# Altium PCB PC-104 16 bit bus.PCBDOC
Units mil, origin at the board's own origin, x right, y up, seen from the top; angles counter-clockwise.
Board outline 3550 x 3775 mil, 10 copper layers (TopLayer, MidLayer1, MidLayer2, MidLayer3, MidLayer4, MidLayer5, MidLayer6, MidLayer7, MidLayer8, BottomLayer); 2 components, 1 nets, 108 pads, 0 vias.
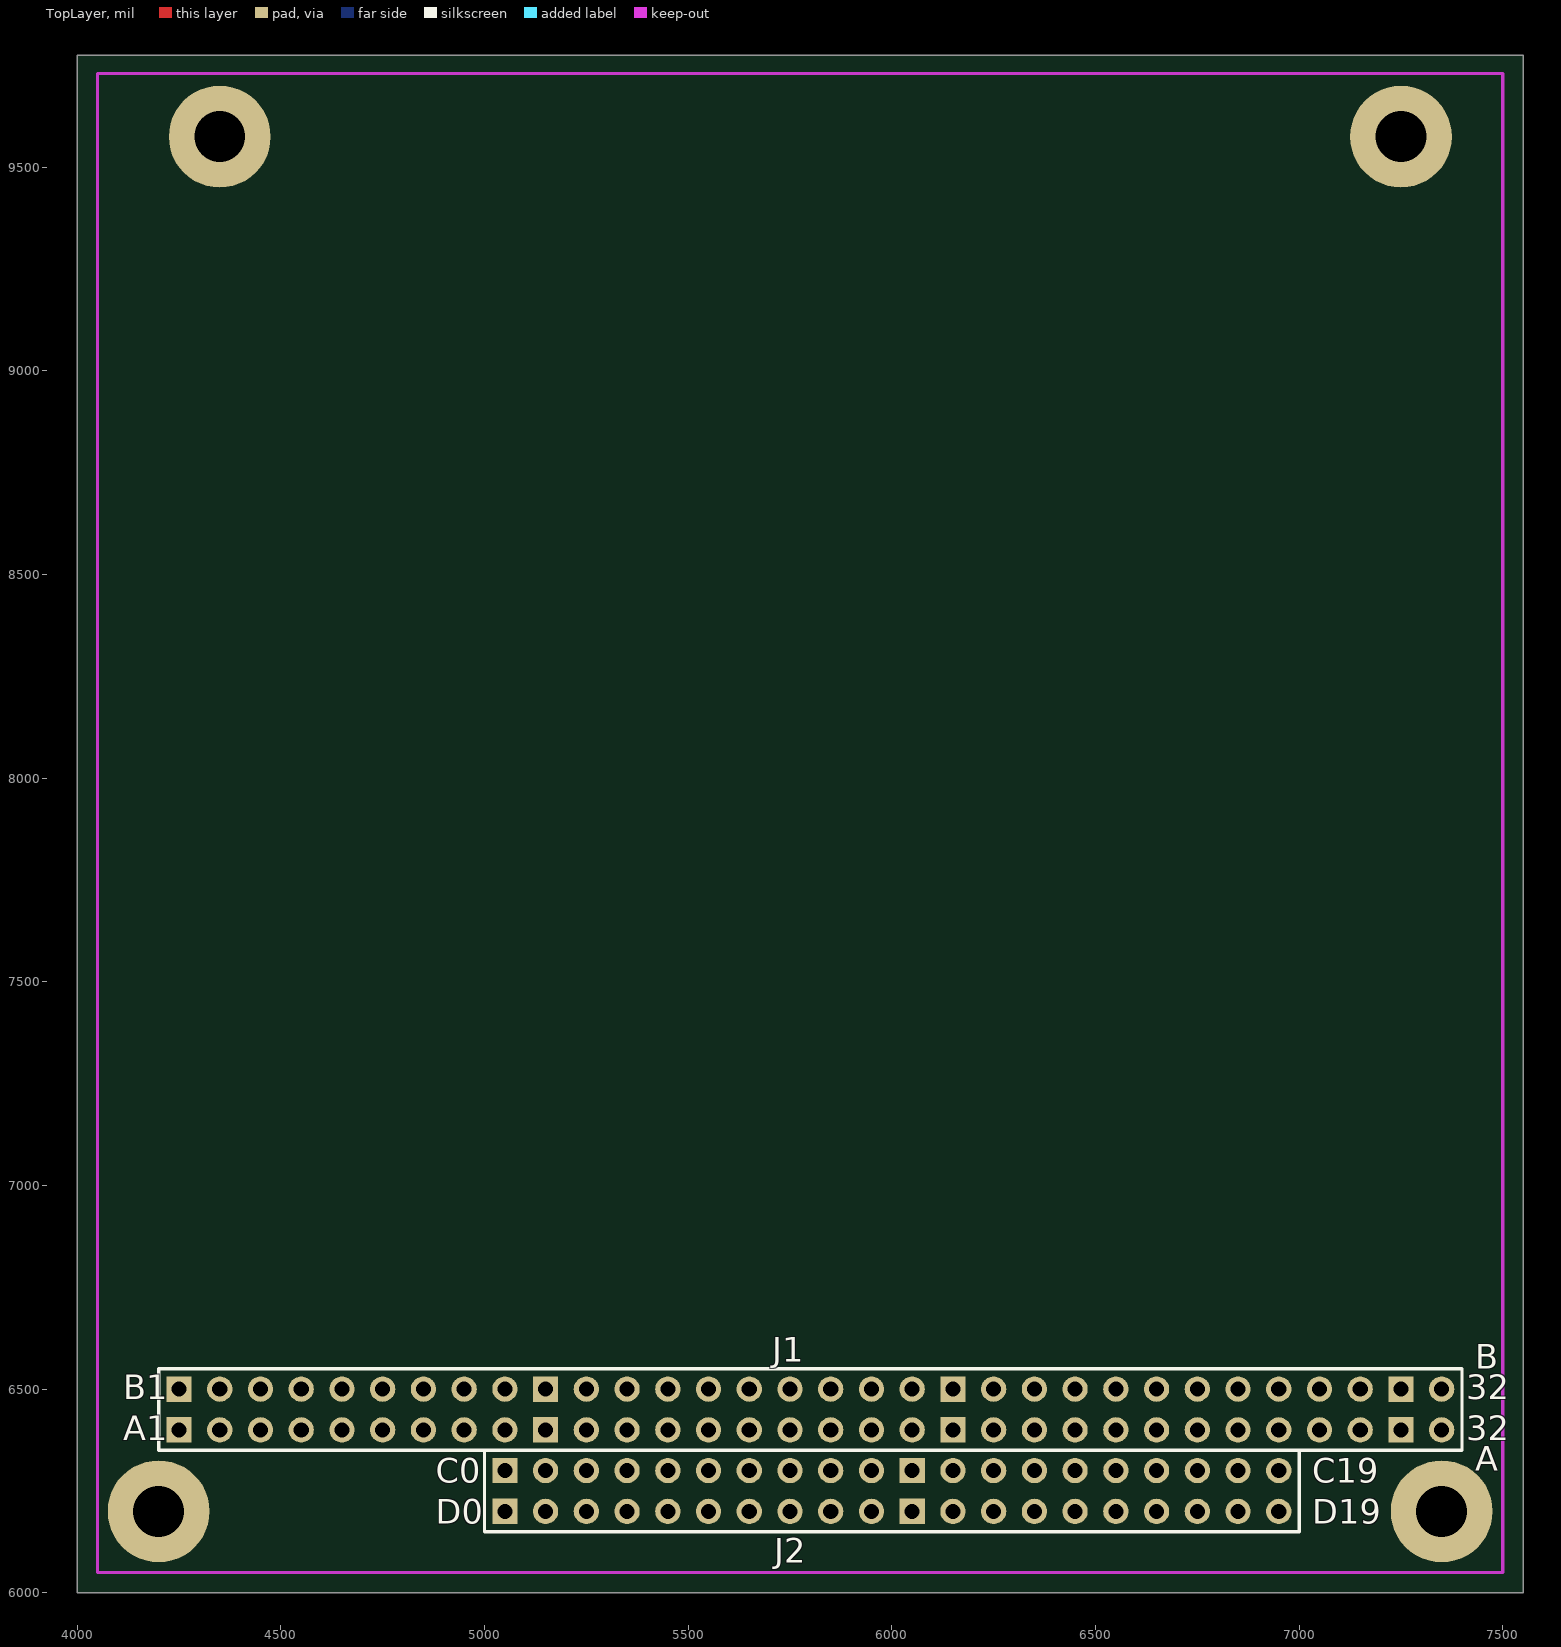
[diagram p0: TopLayer view]
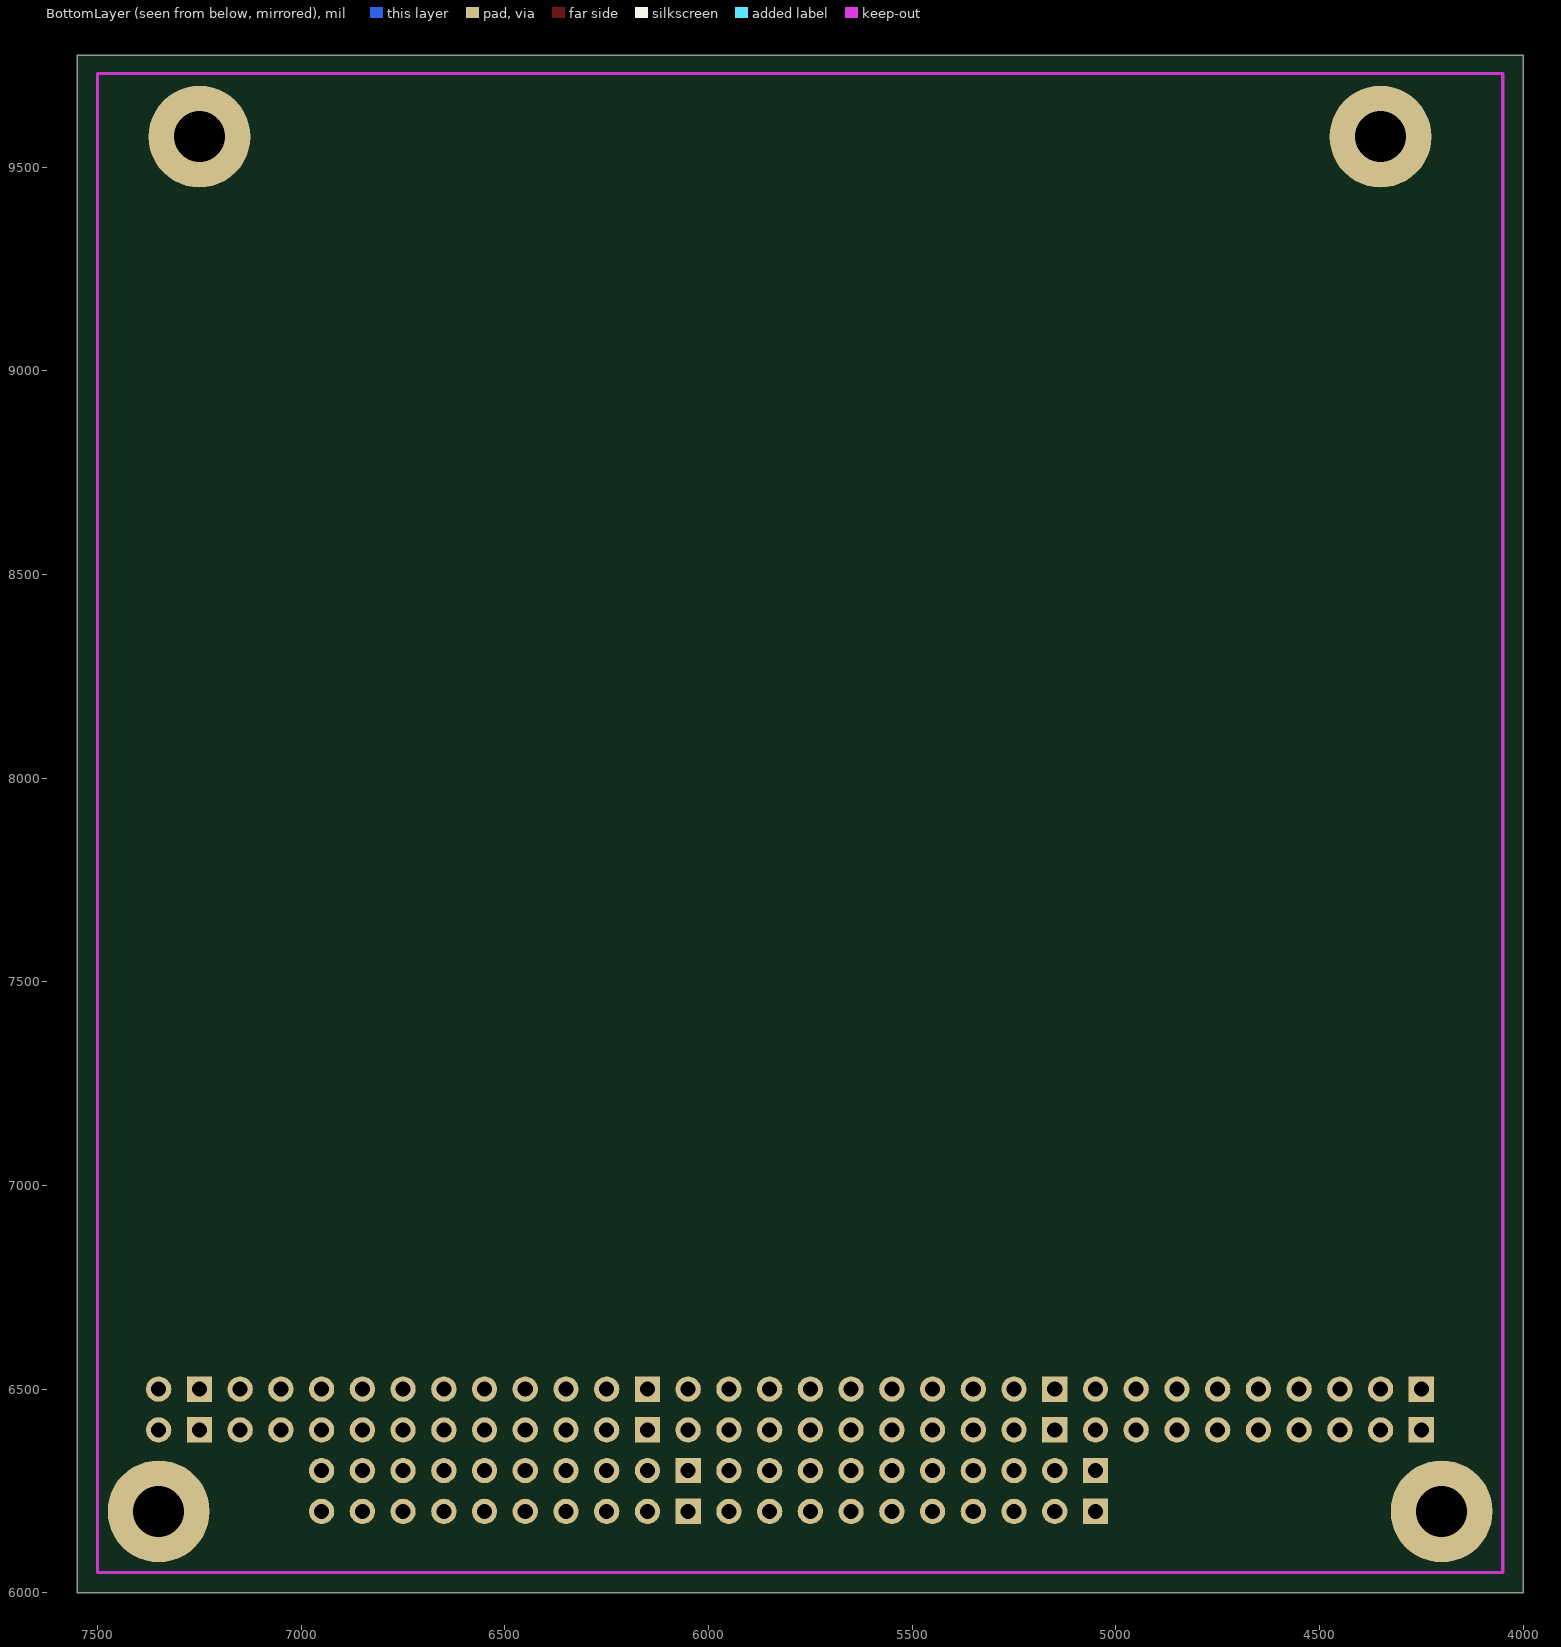
[diagram p1: BottomLayer view, seen from below]
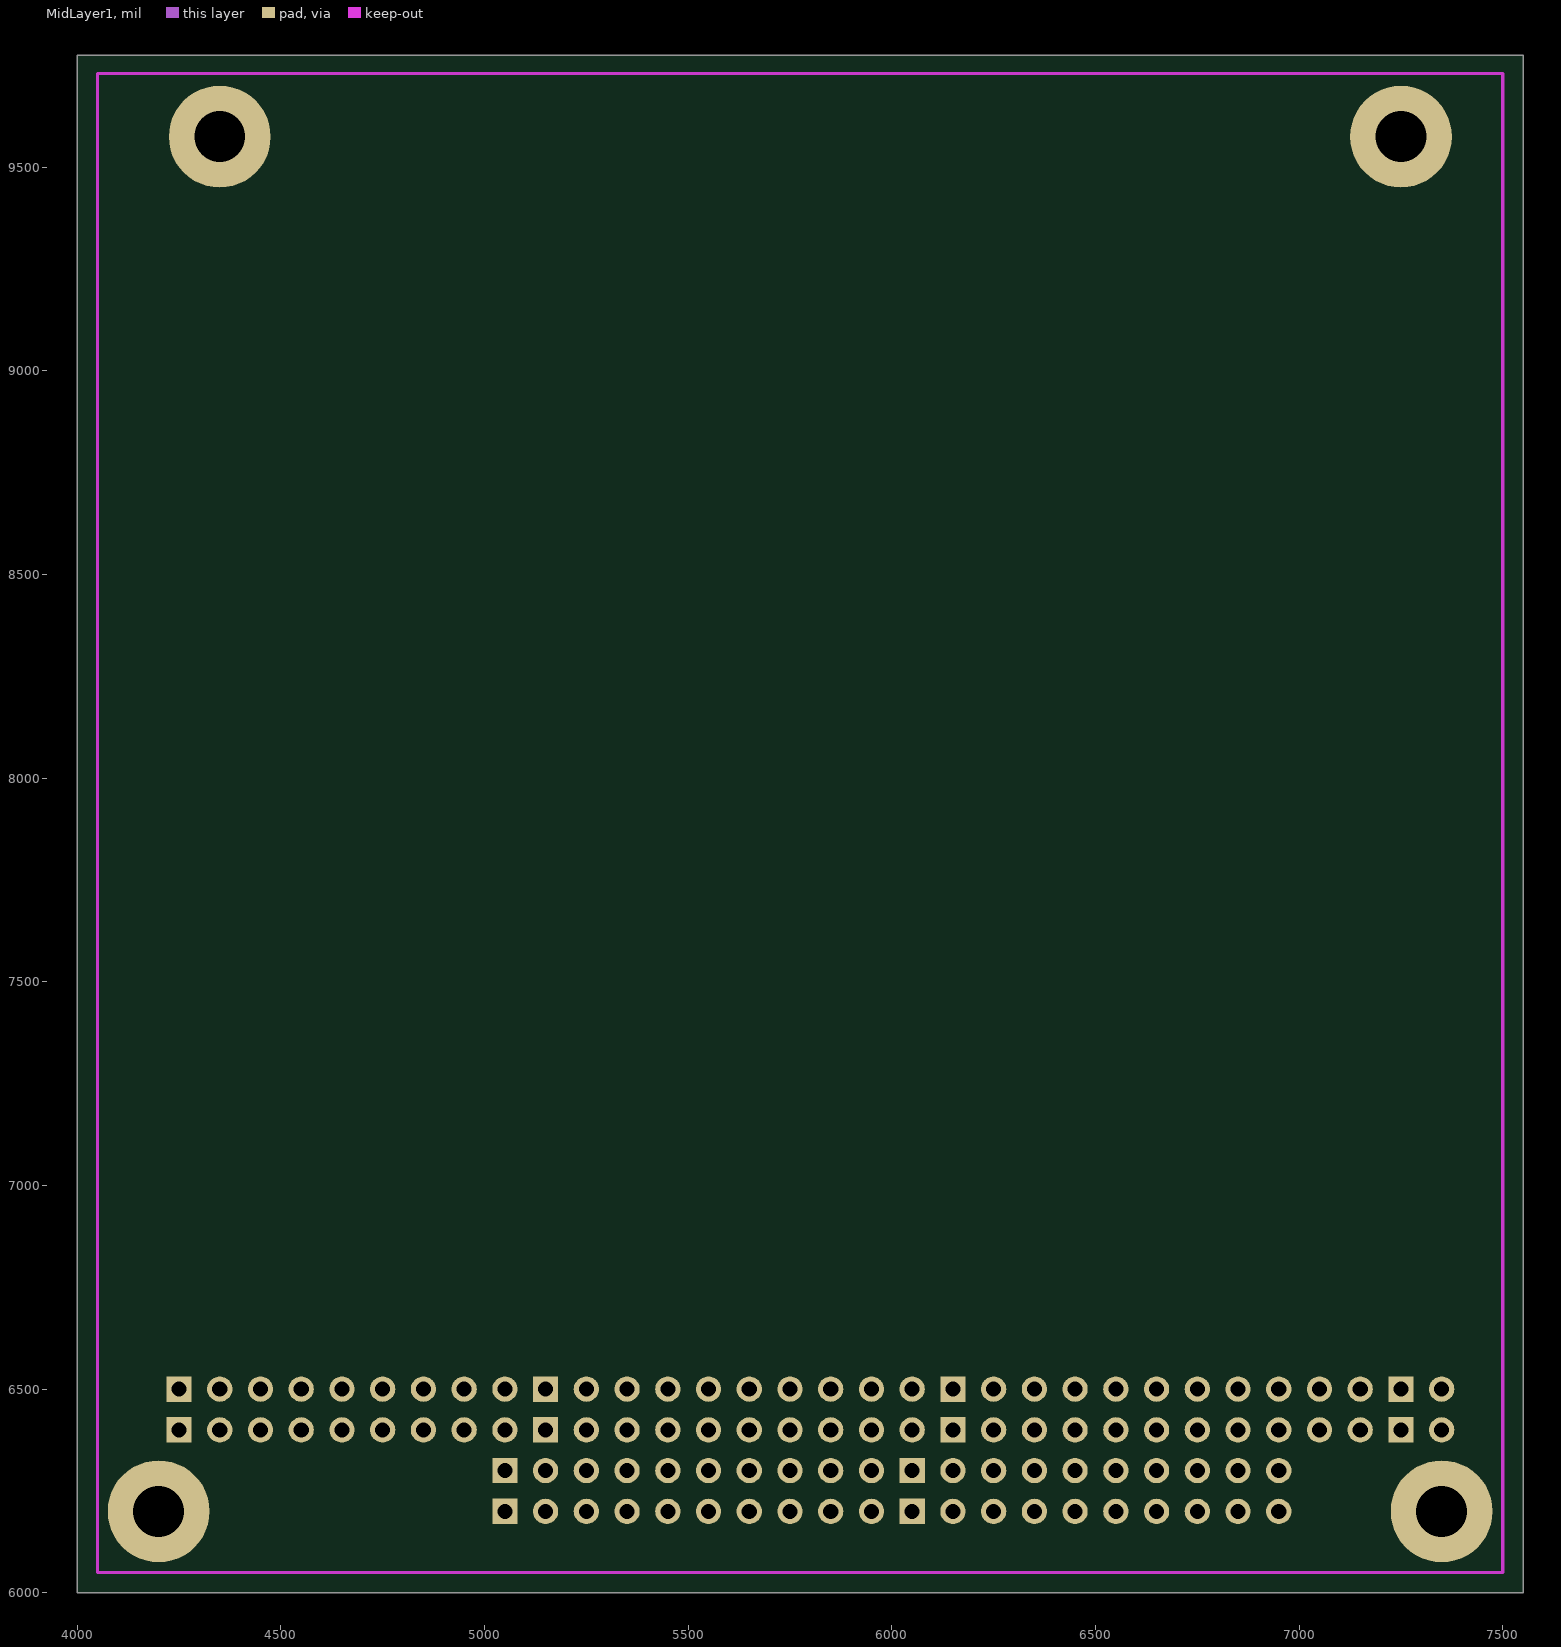
[diagram p2: MidLayer1]
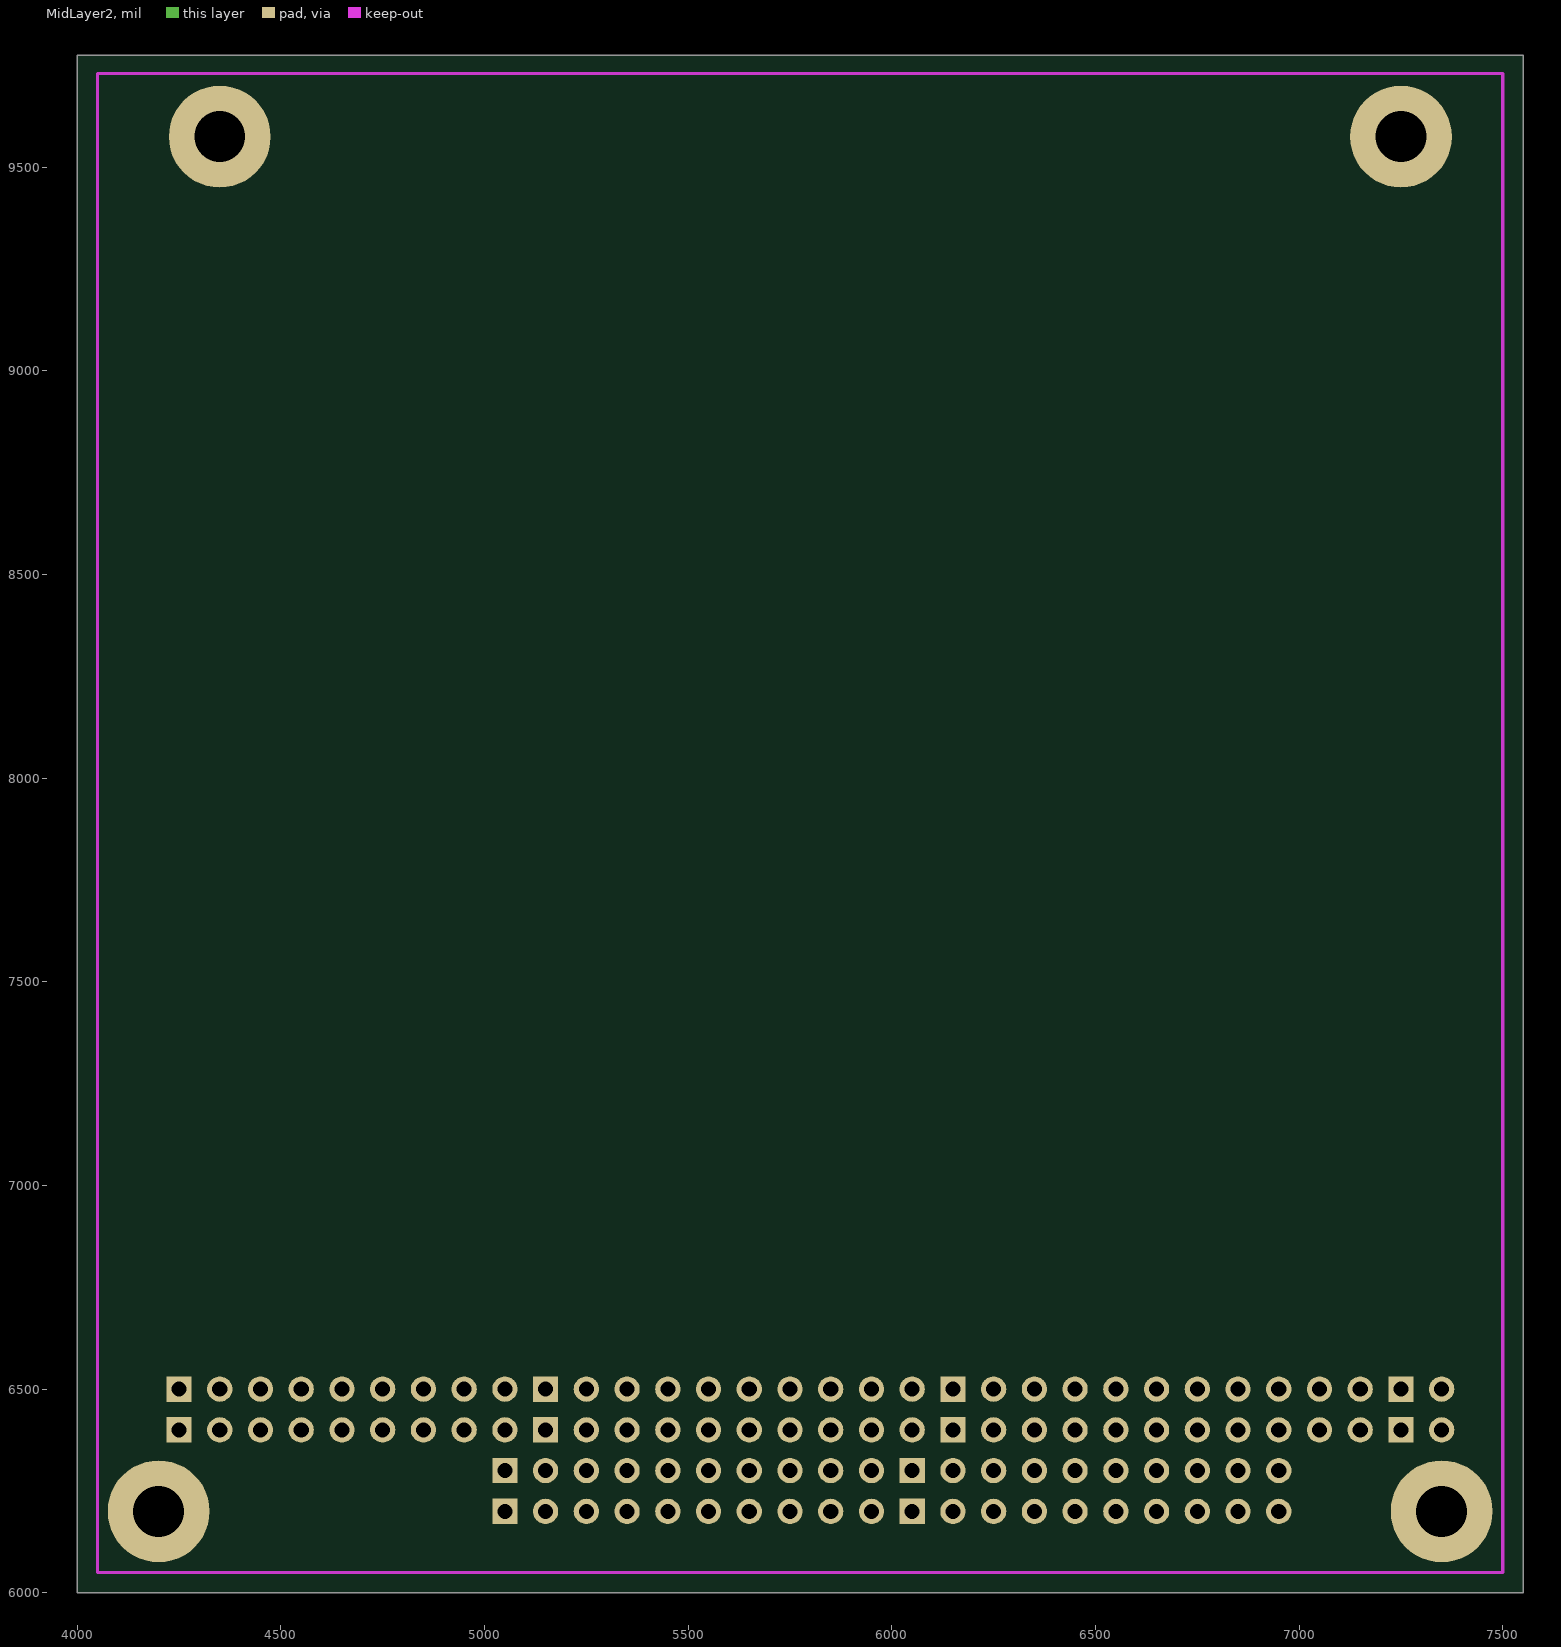
[diagram p3: MidLayer2]
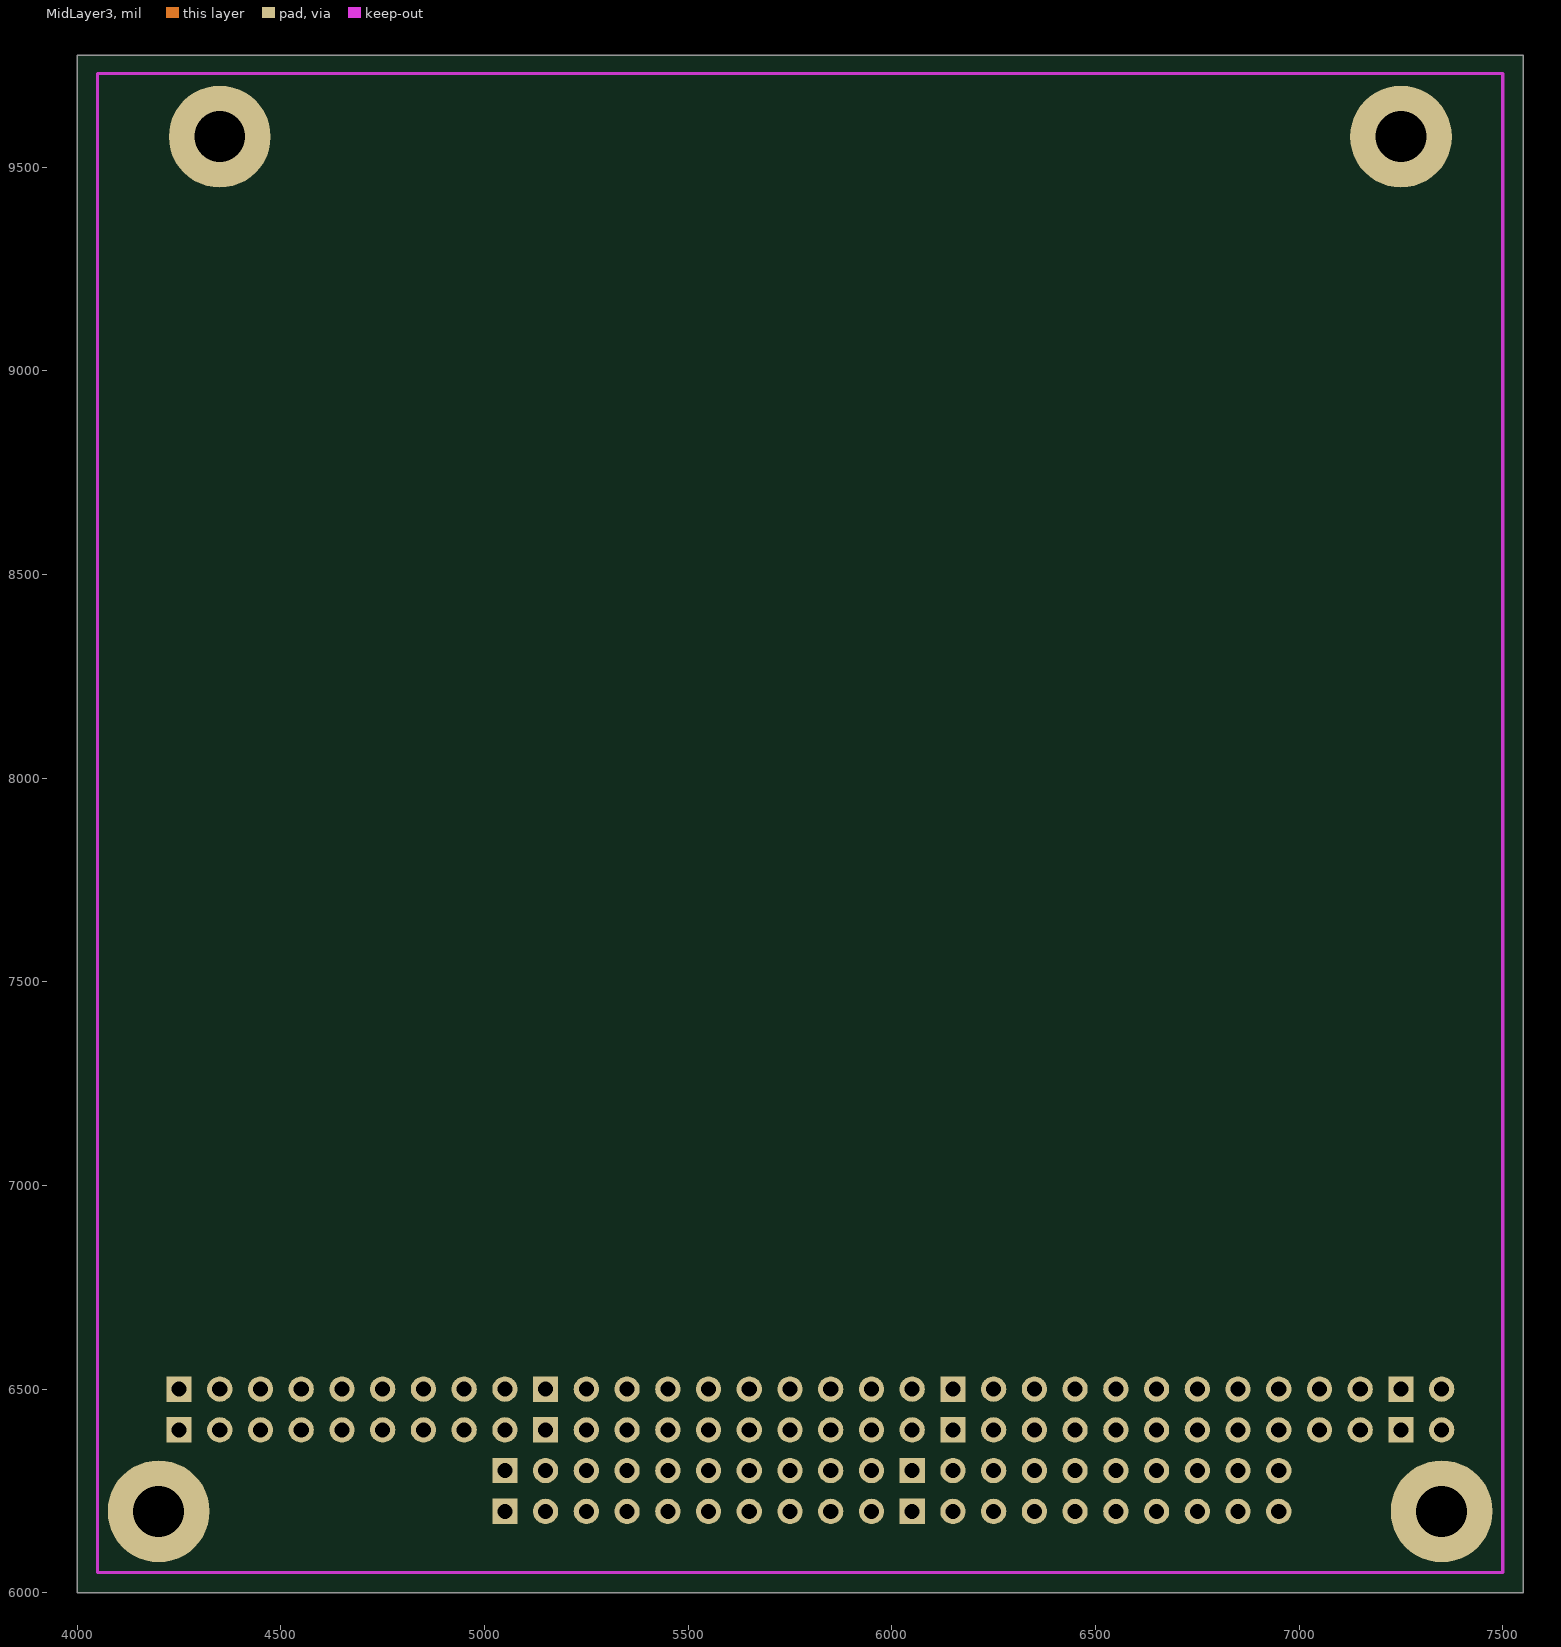
[diagram p4: MidLayer3]
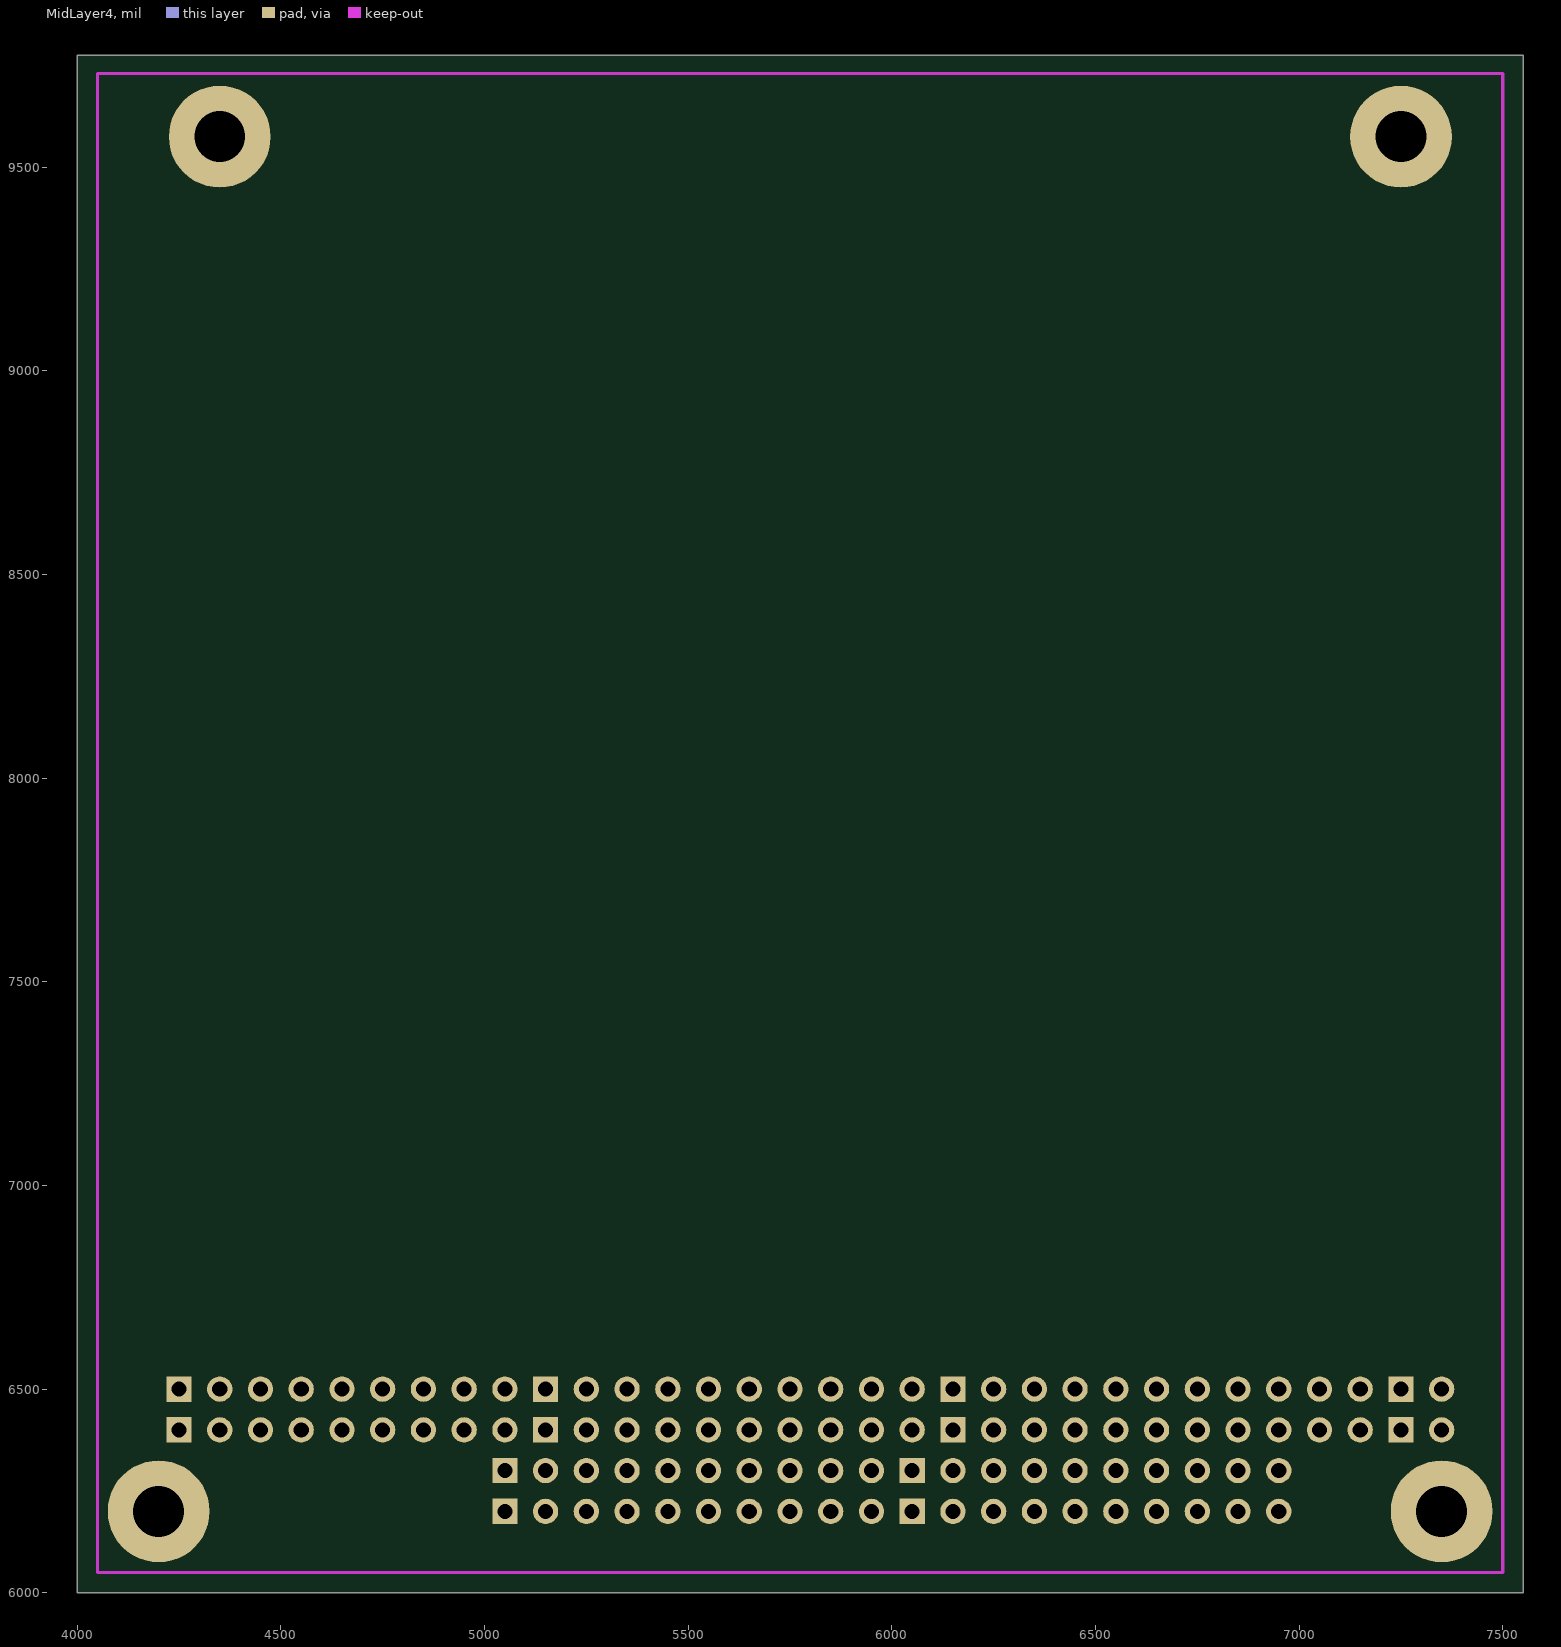
[diagram p5: MidLayer4]
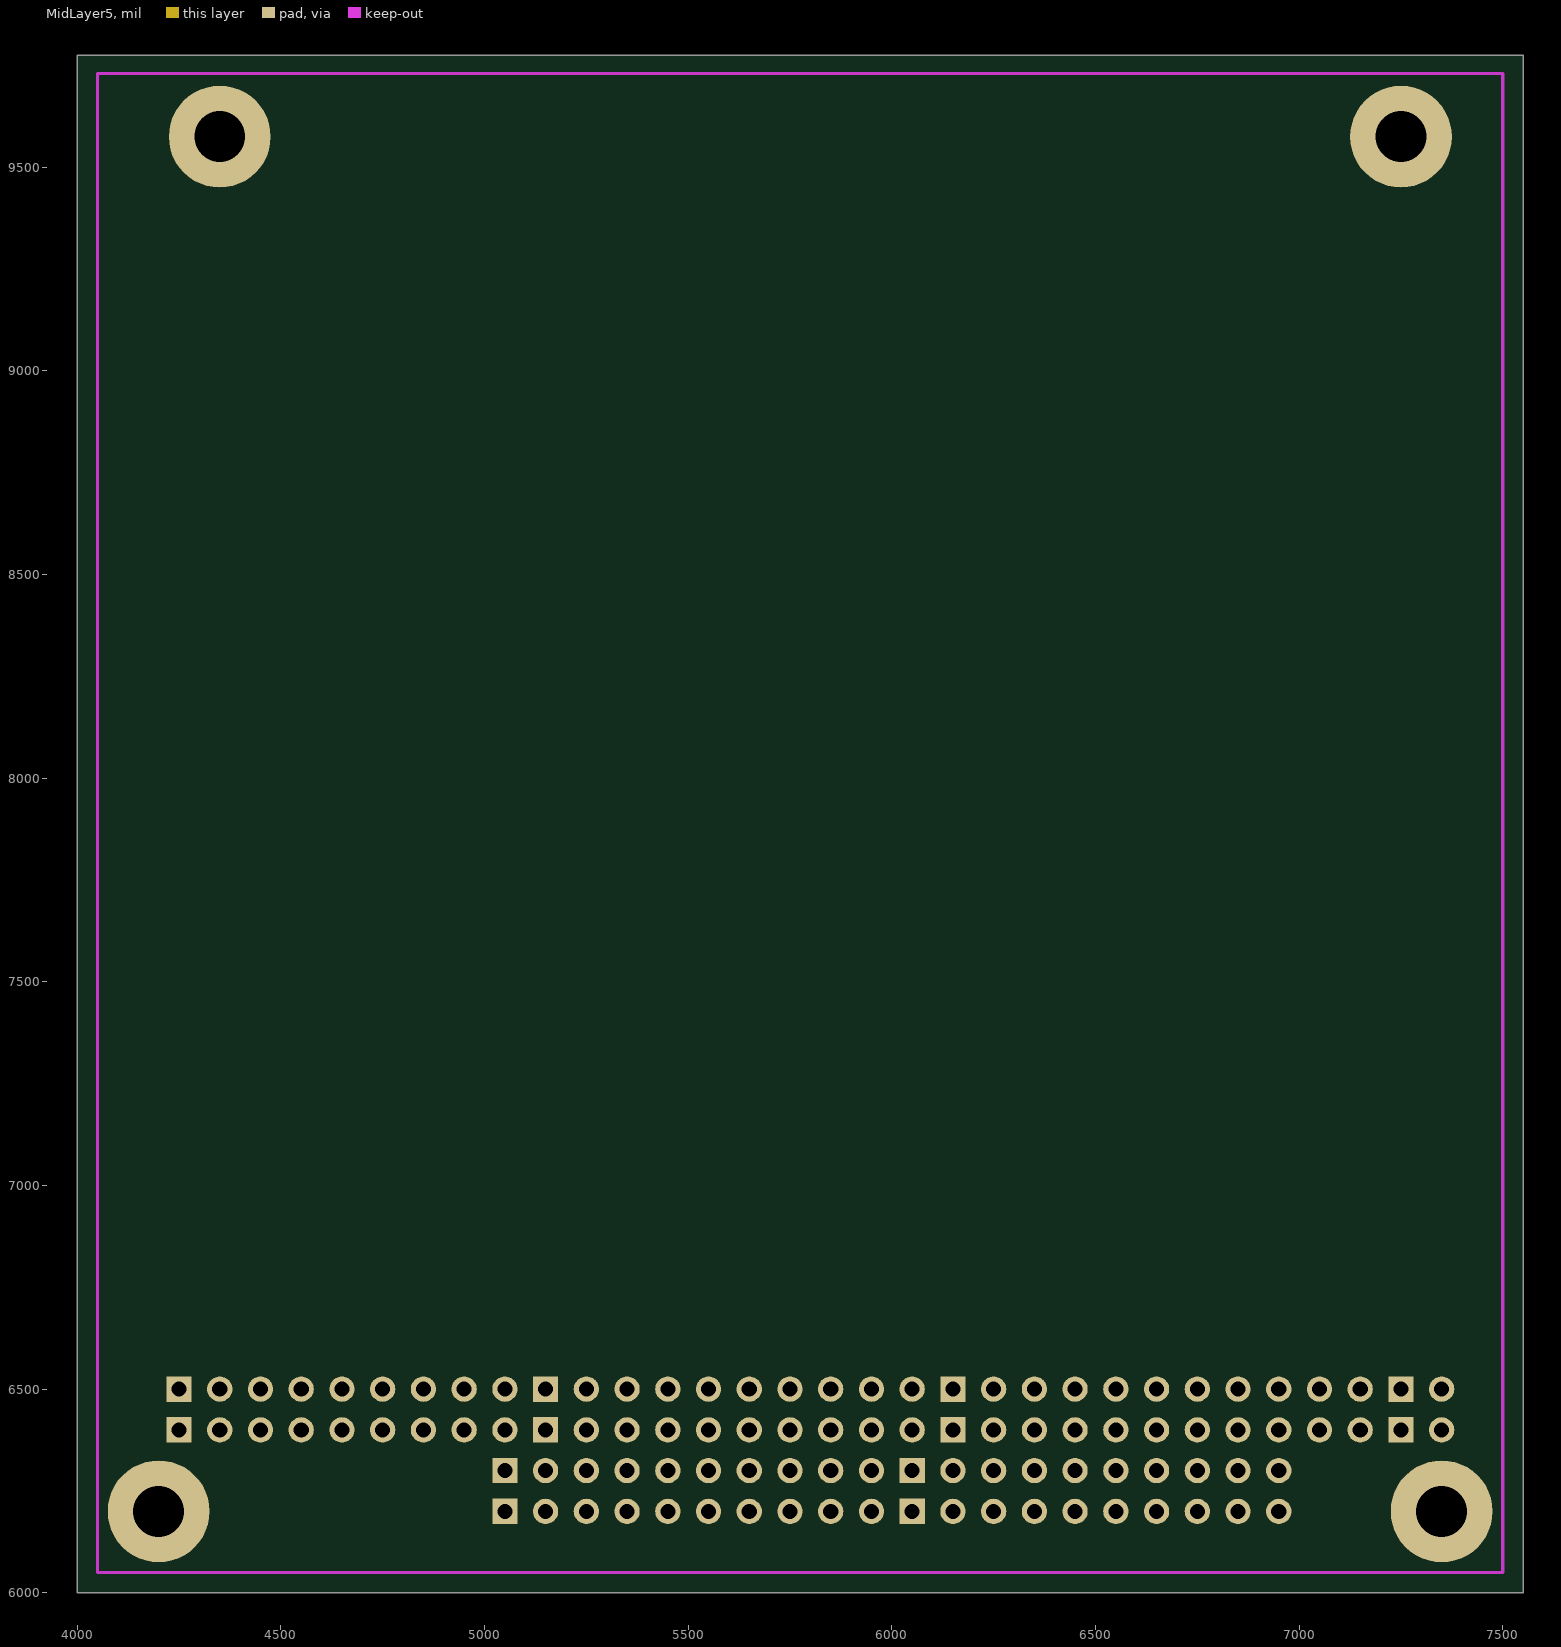
[diagram p6: MidLayer5]
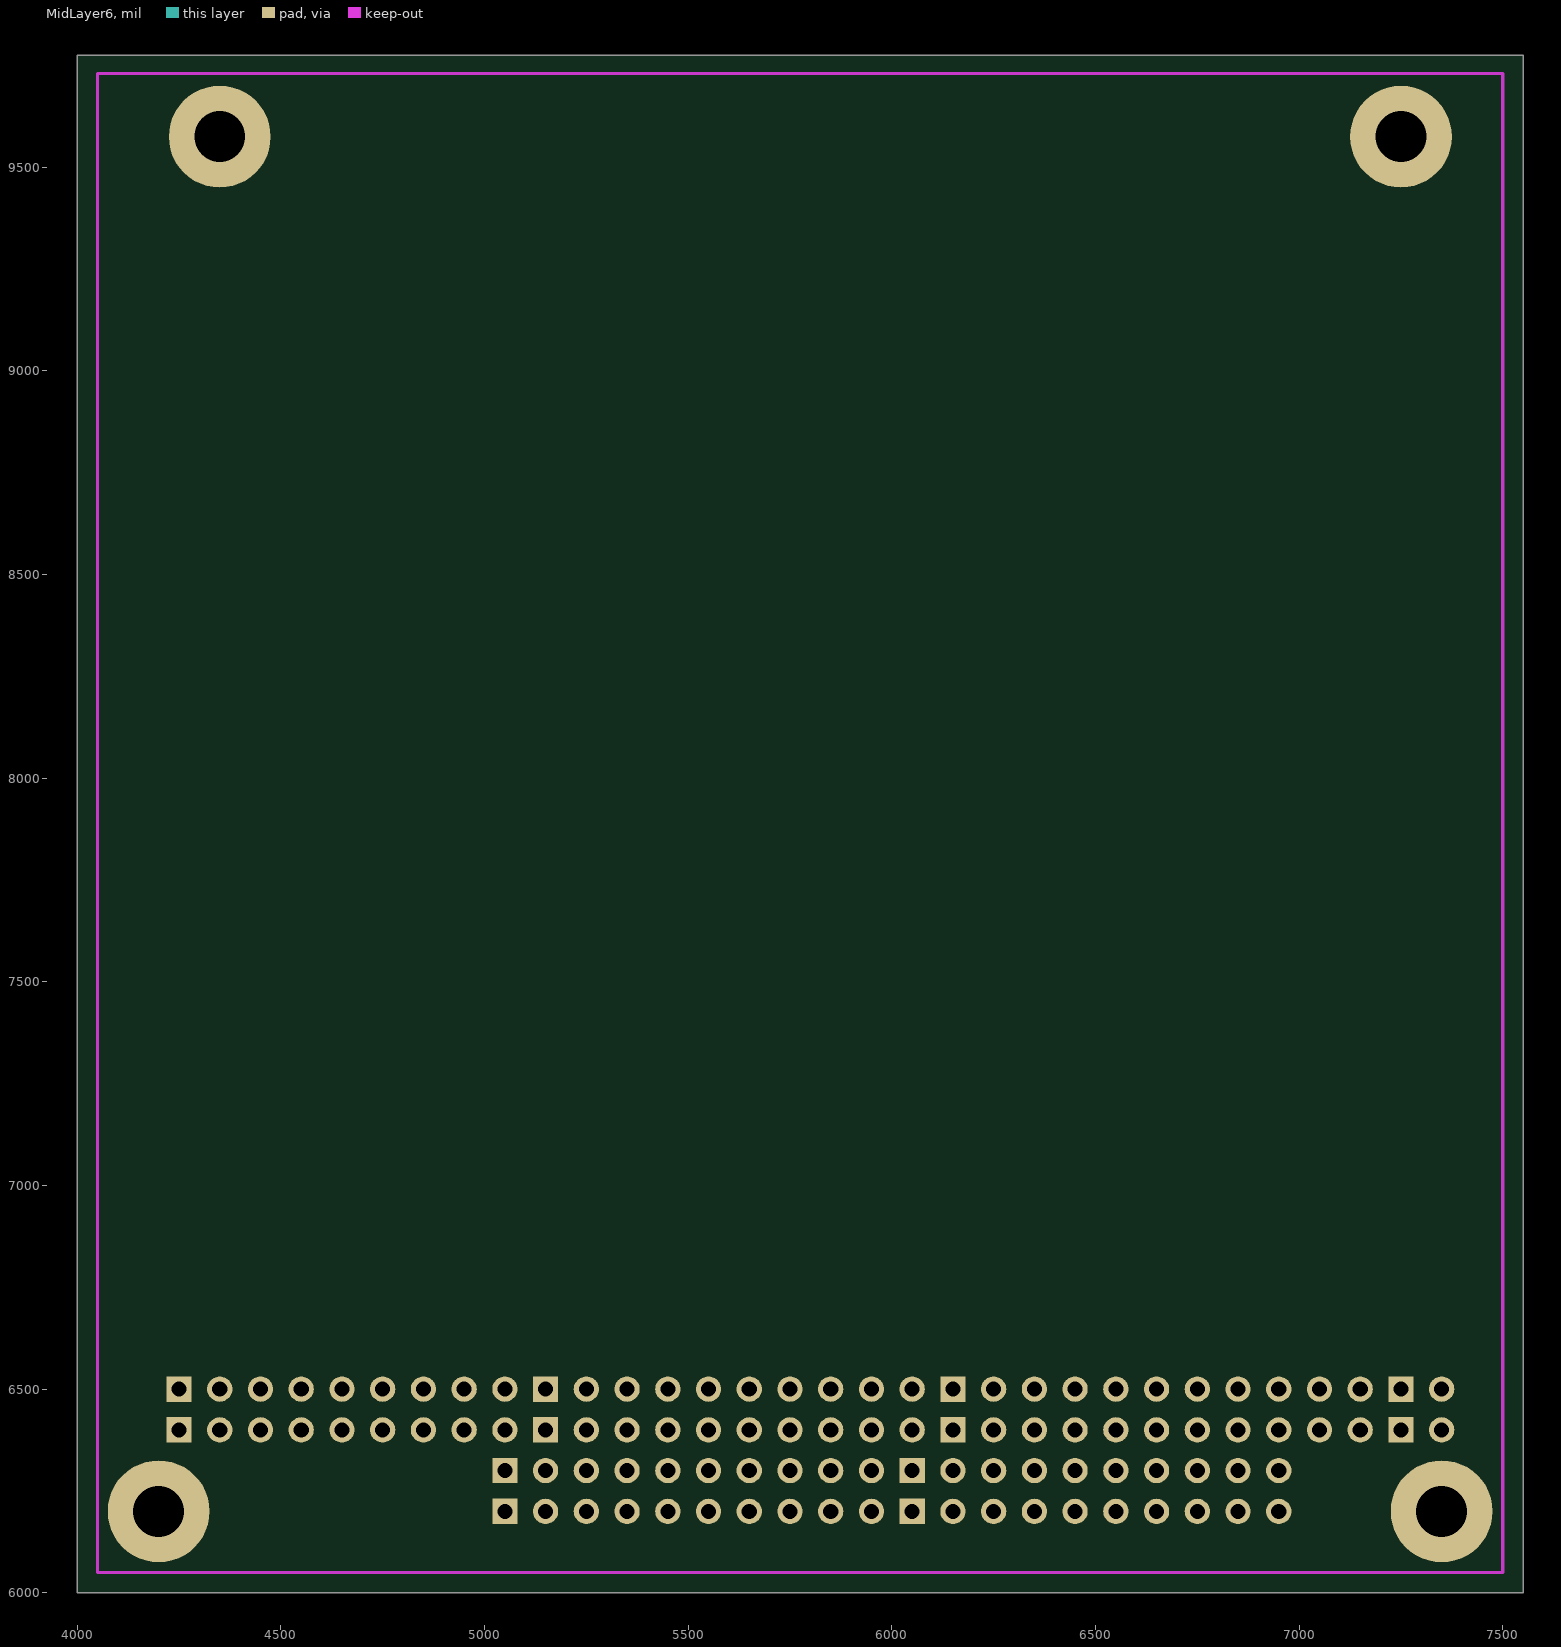
[diagram p7: MidLayer6]
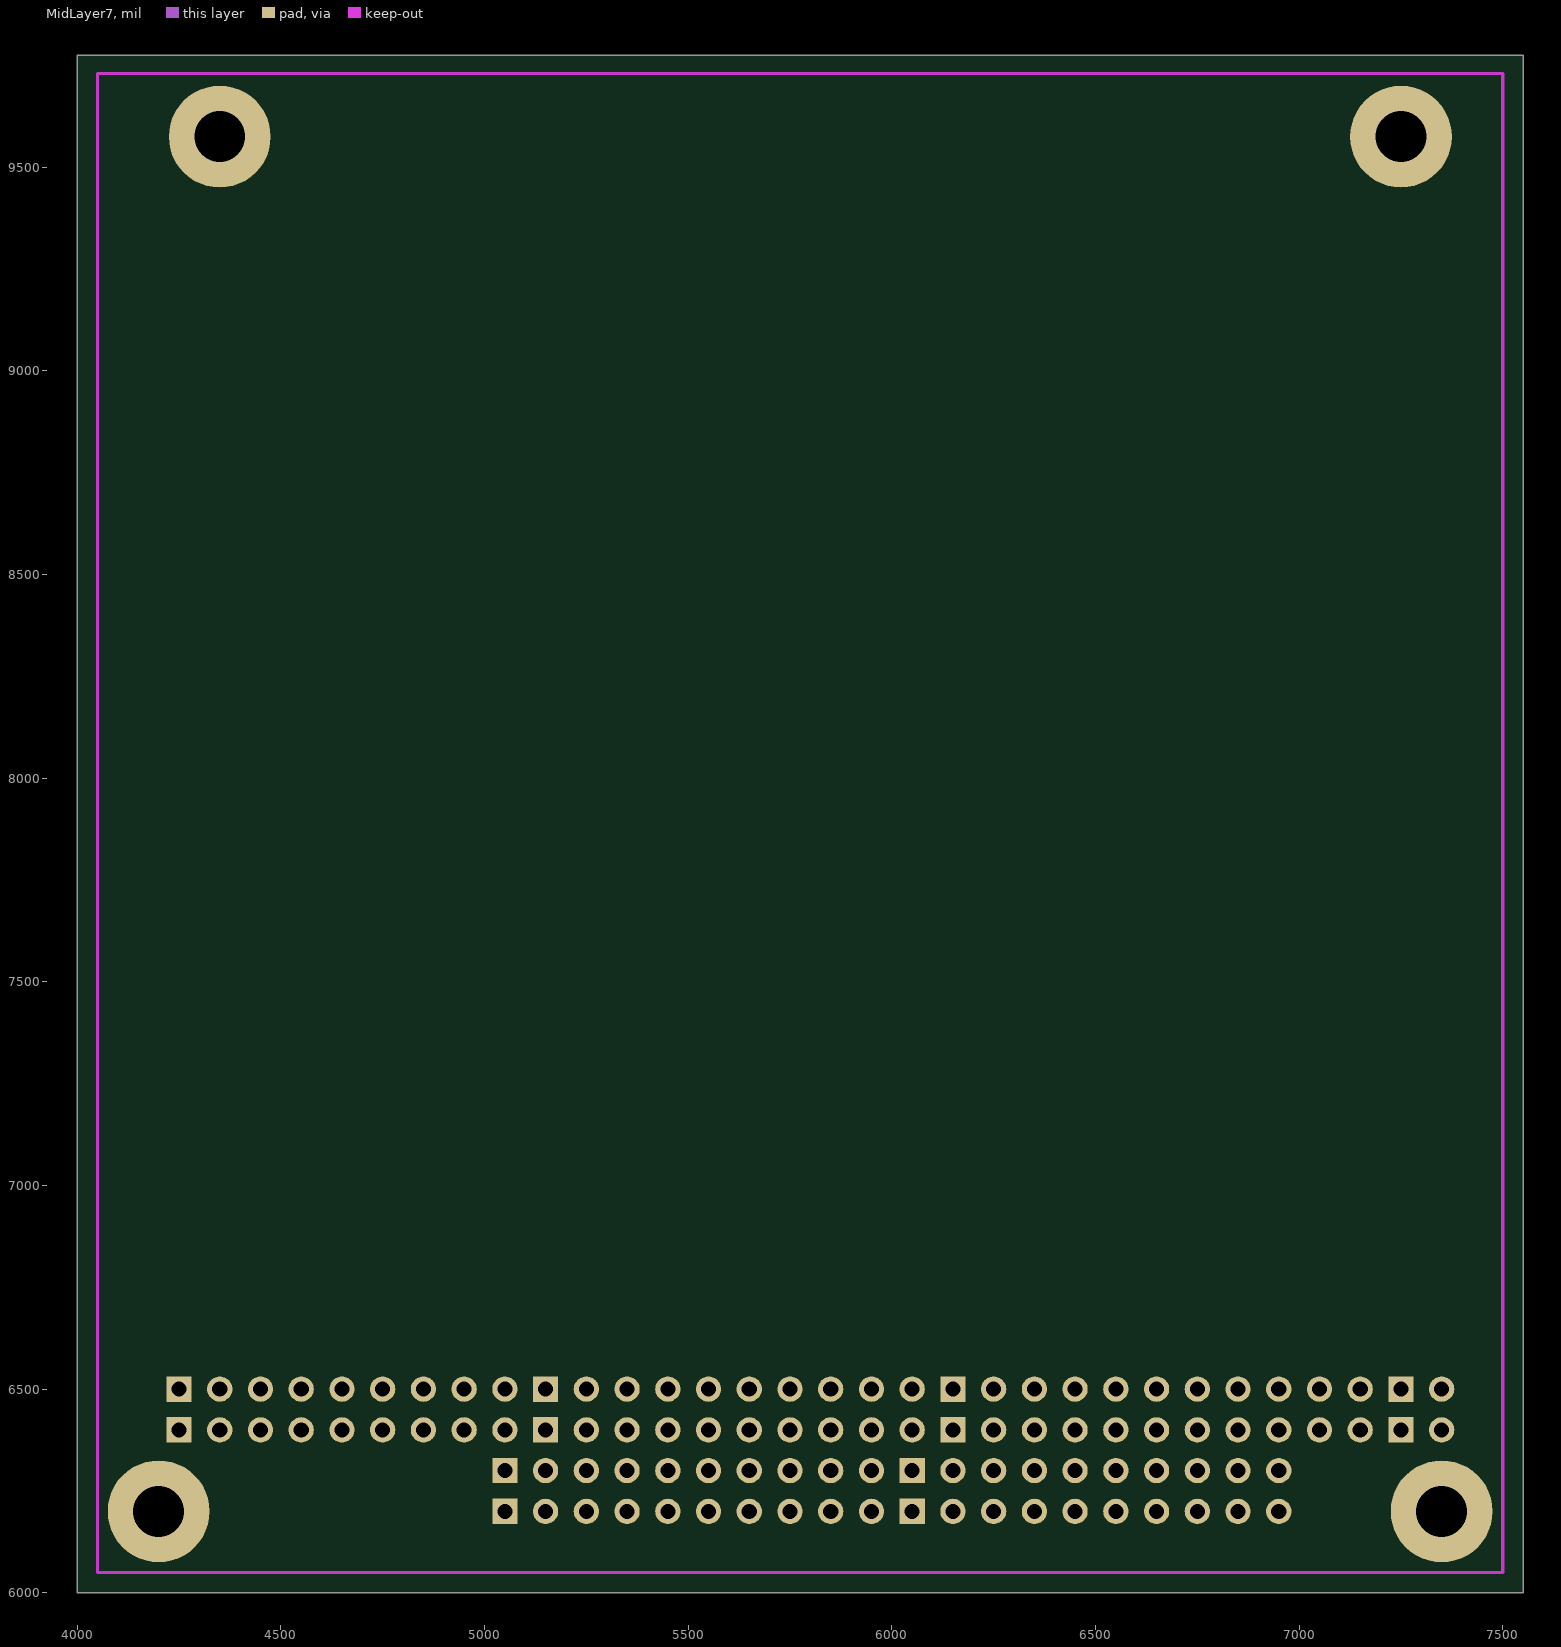
[diagram p8: MidLayer7]
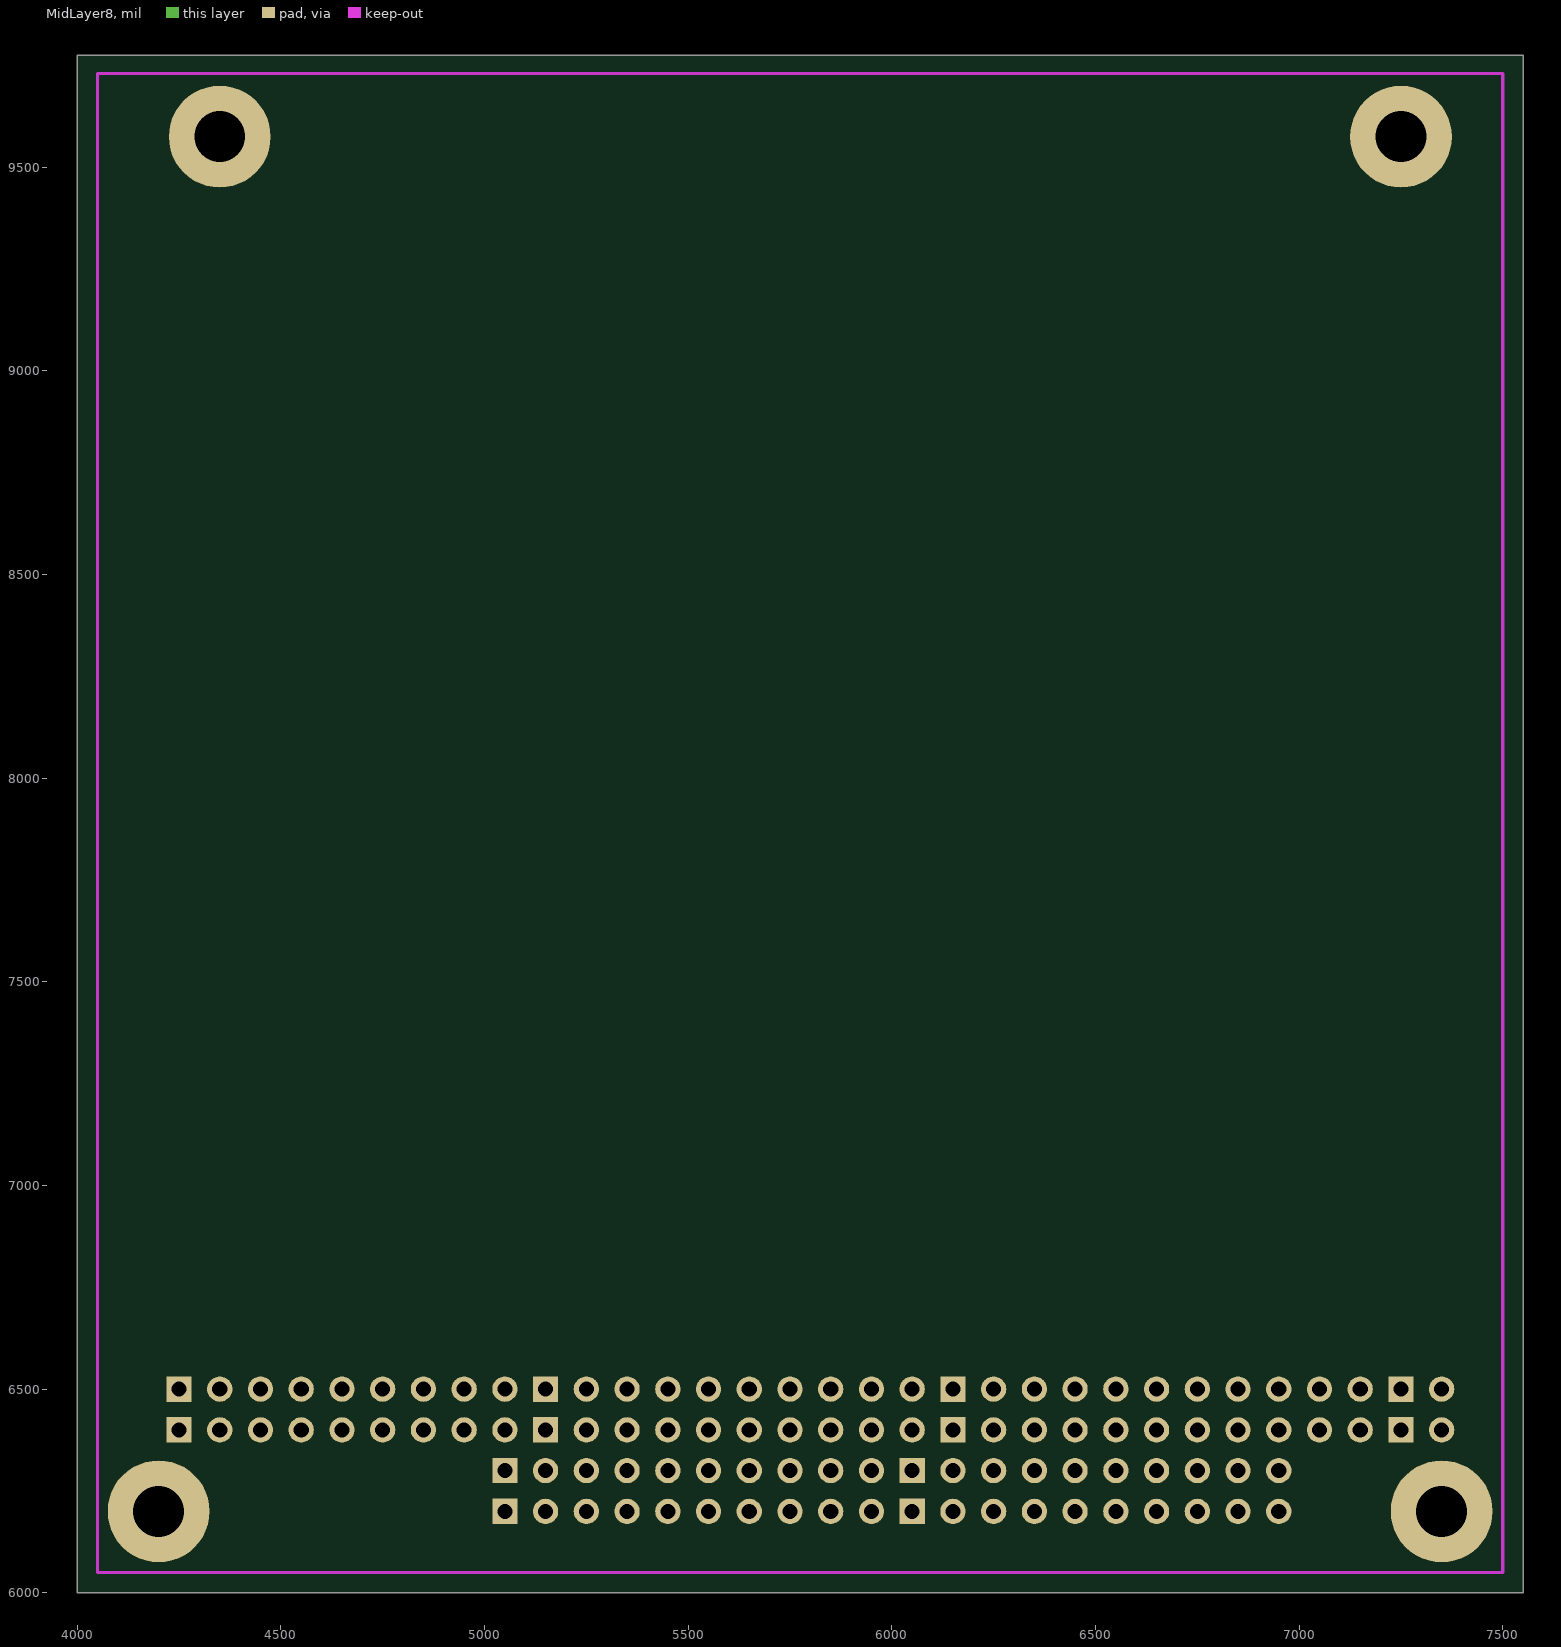
[diagram p9: MidLayer8]

## Layer stack, top to bottom
TopLayer: signal copper 1.4
Dielectric: core 12.6, FR-4, Dk 4.8
MidLayer1: signal copper 1.4
Dielectric: prepreg 12.6, FR-4, Dk 4.8
MidLayer2: signal copper 1.4
Dielectric: core 12.6, FR-4, Dk 4.8
MidLayer3: signal copper 1.4
Dielectric: prepreg 12.6, FR-4, Dk 4.8
MidLayer4: signal copper 1.4
Dielectric: core 12.6, FR-4, Dk 4.8
MidLayer5: signal copper 1.4
Dielectric: prepreg 12.6, FR-4, Dk 4.8
MidLayer6: signal copper 1.4
Dielectric: core 12.6, FR-4, Dk 4.8
MidLayer7: signal copper 1.4
Dielectric: prepreg 12.6, FR-4, Dk 4.8
MidLayer8: signal copper 1.4
Dielectric: core 12.6, FR-4, Dk 4.8
BottomLayer: signal copper 1.4

## Board outline
4000,6000 7550,6000 7550,9775 4000,9775

## Design rules (kind name [scope] priority, off if disabled: settings)
Clearance [All] p1: gap=10
FabricationTestPointUsage TestPointUsage [All] p1: valid=0 allowmultiple=FALSE
FabricationTestpoint Testpoint [All] p1: side=3 testpointundercomponent=TRUE minsize=40 maxsize=100 preferedsize=60 minholesize=20 maxholesize=40 preferedholesize=32 testpointgrid=1 allowsidetop=TRUE allowsidebottom=TRUE usegrid=TRUE gridtolerance=0.01
PlaneClearance [All] p1: clearance=0
PolygonConnect [All] p1: connectstyle=Relief reliefconductorwidth=10 reliefentries=4 polygonreliefangle="90 Angle"
RoutingVias [All] p1: holewidth=20 width=50 viastyle="Through Hole" minholewidth=28 minwidth=50 maxholewidth=28 maxwidth=50
SilkscreenOverComponentPads [All] p1: minsilkscreentomaskgap=10
SolderMaskExpansion [All] p1: expansion=4
Width [All] p1: maxlimit=10 minlimit=10 preferedwidth=10
24 further rules are at their usual default settings.

## Components (designator, comment, footprint, x,y, rotation, side; value= is the part's Value field where it differs from the comment)
J1 "" PC104AB 4250,6400 r0 top locked
J2 "" PC104CD 5050,6300 r0 top locked

## Footprints (in the part's own frame and the unit in brackets; to place one, negate y for a bottom-side part, rotate by r counter-clockwise, add the part's x,y. Pads: shape width x height; smd on the part's side, far side on the other; paste and mask are expansions set on the pad)
PC104AB [mil]
  rect 62x62 hole 37: A1(0,0) A10(900,0) A20(1900,0) A31(3000,0) B1(0,100) B10(900,100) B20(1900,100) B31(3000,100)
  round 62 hole 37: A2(100,0) A3(200,0) A4(300,0) A5(400,0) A6(500,0) A7(600,0) A8(700,0) A9(800,0) A11(1000,0) A12(1100,0) A13(1200,0) A14(1300,0) A15(1400,0) A16(1500,0) A17(1600,0) A18(1700,0) A19(1800,0) A21(2000,0) A22(2100,0) A23(2200,0) A24(2300,0) A25(2400,0) A26(2500,0) A27(2600,0) A28(2700,0) A29(2800,0) A30(2900,0) A32(3100,0) B2(100,100) B3(200,100) B4(300,100) B5(400,100) B6(500,100) B7(600,100) B8(700,100) B9(800,100) B11(1000,100) B12(1100,100) B13(1200,100) B14(1300,100) B15(1400,100) B16(1500,100) B17(1600,100) B18(1700,100) B19(1800,100) B21(2000,100) B22(2100,100) B23(2200,100) B24(2300,100) B25(2400,100) B26(2500,100) B27(2600,100) B28(2700,100) B29(2800,100) B30(2900,100) B32(3100,100)
  silkscreen extent -50,-50 3150,150
PC104CD [mil]
  rect 62x62 hole 37: C0(0,0) C10(1000,0) D0(0,-100) D10(1000,-100)
  round 62 hole 37: C1(100,0) C2(200,0) C3(300,0) C4(400,0) C5(500,0) C6(600,0) C7(700,0) C8(800,0) C9(900,0) C11(1100,0) C12(1200,0) C13(1300,0) C14(1400,0) C15(1500,0) C16(1600,0) C17(1700,0) C18(1800,0) C19(1900,0) D1(100,-100) D2(200,-100) D3(300,-100) D4(400,-100) D5(500,-100) D6(600,-100) D7(700,-100) D8(800,-100) D9(900,-100) D11(1100,-100) D12(1200,-100) D13(1300,-100) D14(1400,-100) D15(1500,-100) D16(1600,-100) D17(1700,-100) D18(1800,-100) D19(1900,-100)
  silkscreen extent -50,-150 1950,50

## Free pads (board coordinates)
  round 250 hole 125: 1(4200,6200) 2(7250,9575) 3(7350,6200) 4(4350,9575)

## Nets (pads, with @x,y where several pads share a name; then routed paths per layer and width w, separated by ;. In a path a pad name is that pad's centre, name@x,y a point inside that pad or via, vN(x,y) a via of type N, cw(c..) or ccw(c..) an arc to the next point about the centre after c; other vN are vias at no path point)
"": 
pads on no net: J1.A1 J1.A2 J1.A3 J1.A4 J1.A5 J1.A6 J1.A7 J1.A8 J1.A9 J1.A10 J1.A11 J1.A12 J1.A13 J1.A14 J1.A15 J1.A16 J1.A17 J1.A18 J1.A19 J1.A20 J1.A21 J1.A22 J1.A23 J1.A24 J1.A25 J1.A26 J1.A27 J1.A28 J1.A29 J1.A30 J1.A31 J1.A32 J1.B1 J1.B2 J1.B3 J1.B4 J1.B5 J1.B6 J1.B7 J1.B8 J1.B9 J1.B10 J1.B11 J1.B12 J1.B13 J1.B14 J1.B15 J1.B16 J1.B17 J1.B18 J1.B19 J1.B20 J1.B21 J1.B22 J1.B23 J1.B24 J1.B25 J1.B26 J1.B27 J1.B28 J1.B29 J1.B30 J1.B31 J1.B32 J2.C0 J2.C1 J2.C2 J2.C3 J2.C4 J2.C5 J2.C6 J2.C7 J2.C8 J2.C9 J2.C10 J2.C11 J2.C12 J2.C13 J2.C14 J2.C15 J2.C16 J2.C17 J2.C18 J2.C19 J2.D0 J2.D1 J2.D2 J2.D3 J2.D4 J2.D5 J2.D6 J2.D7 J2.D8 J2.D9 J2.D10 J2.D11 J2.D12 J2.D13 J2.D14 J2.D15 J2.D16 J2.D17 J2.D18 J2.D19

## Keep-outs
KeepOutLayer:
  lines w8: 4050,6050 4050,9730 7500,9730 7500,6050 4050,6050

## Other copper
TopLayer:
  text ".GTL" at 7230,9908 h90
MidLayer1:
  text ".G1" at 7230,9908 h90
MidLayer2:
  text ".G2" at 7230,9908 h90
MidLayer3:
  text ".G3" at 7230,9908 h90
MidLayer4:
  text ".G4" at 7230,9908 h90
MidLayer5:
  text ".G5" at 7230,9908 h90
MidLayer6:
  text ".G6" at 7230,9908 h90
MidLayer7:
  text ".G7" at 7230,9908 h90
MidLayer8:
  text ".G8" at 7230,9908 h90
BottomLayer:
  text "P/N XXXXXX-XXX REV A" at 5320,10238 h75
  text ".GBL" at 7230,9908 h90

## Silkscreen, mask and mechanical layers (free items; w line width, h text height)
TopOverlay:
  rectangle: 4281,10731 5031,10931
  rectangle: 4281,10441 5031,10641
  lines w10: 5392.59,10833.97 ccw(c5441,10873.5) 5392.71,10833.83
  text "C" at 5496,10836 h60
  text "2002 COMPANY NAME" at 5646,10836 h75
  text "S/N" at 4031,10788.5 h75
  text "BOARD NAME" at 5496,10661 h75
  text "ASSY NO.: XXXXXX" at 5496,10511 h75
  text "REV" at 4031,10491 h75
  text ".GTO" at 7230,9908 h90
TopPaste:
  text ".GTP" at 7230,9908 h90
BottomPaste:
  text ".GBP" at 7230,9908 h90
TopSolder:
  text ".GTS" at 7230,9908 h90
BottomSolder:
  text ".GBS" at 7230,9908 h90
Mechanical1:
  the board outline again, w8
Mechanical4:
  text ".Pcb_File_Name_No_Path" at 5330,10098 h90
  text ".Printout_Name" at 5330,9928 h90
DrillDrawing:
  text ".LEGEND" at 7895,6220 h90
  text "Drilling Details." at 7895,6070 h90

## Dimensions
4200,5980 to 4000,6000 on Mechanical4
3980,6200 to 4000,6000 on Mechanical4

## Text inside footprints (layer, text, board x,y; h text height)
J1: TopOverlay "B1" at 4112.5,6475 h60; TopOverlay "A1" at 4112.5,6375 h60; TopOverlay "32" at 7410,6375 h60; TopOverlay "32" at 7410,6475 h60; TopOverlay "A" at 7432.5,6300 h60; TopOverlay "B" at 7432.5,6550 h60
J2: TopOverlay "C0" at 4880,6270 h60; TopOverlay "D0" at 4880,6170 h60; TopOverlay "C19" at 7032.5,6270 h60; TopOverlay "D19" at 7032.5,6170 h60